# EAGLE board Shim_IWM (EAGLE 9.6.2)
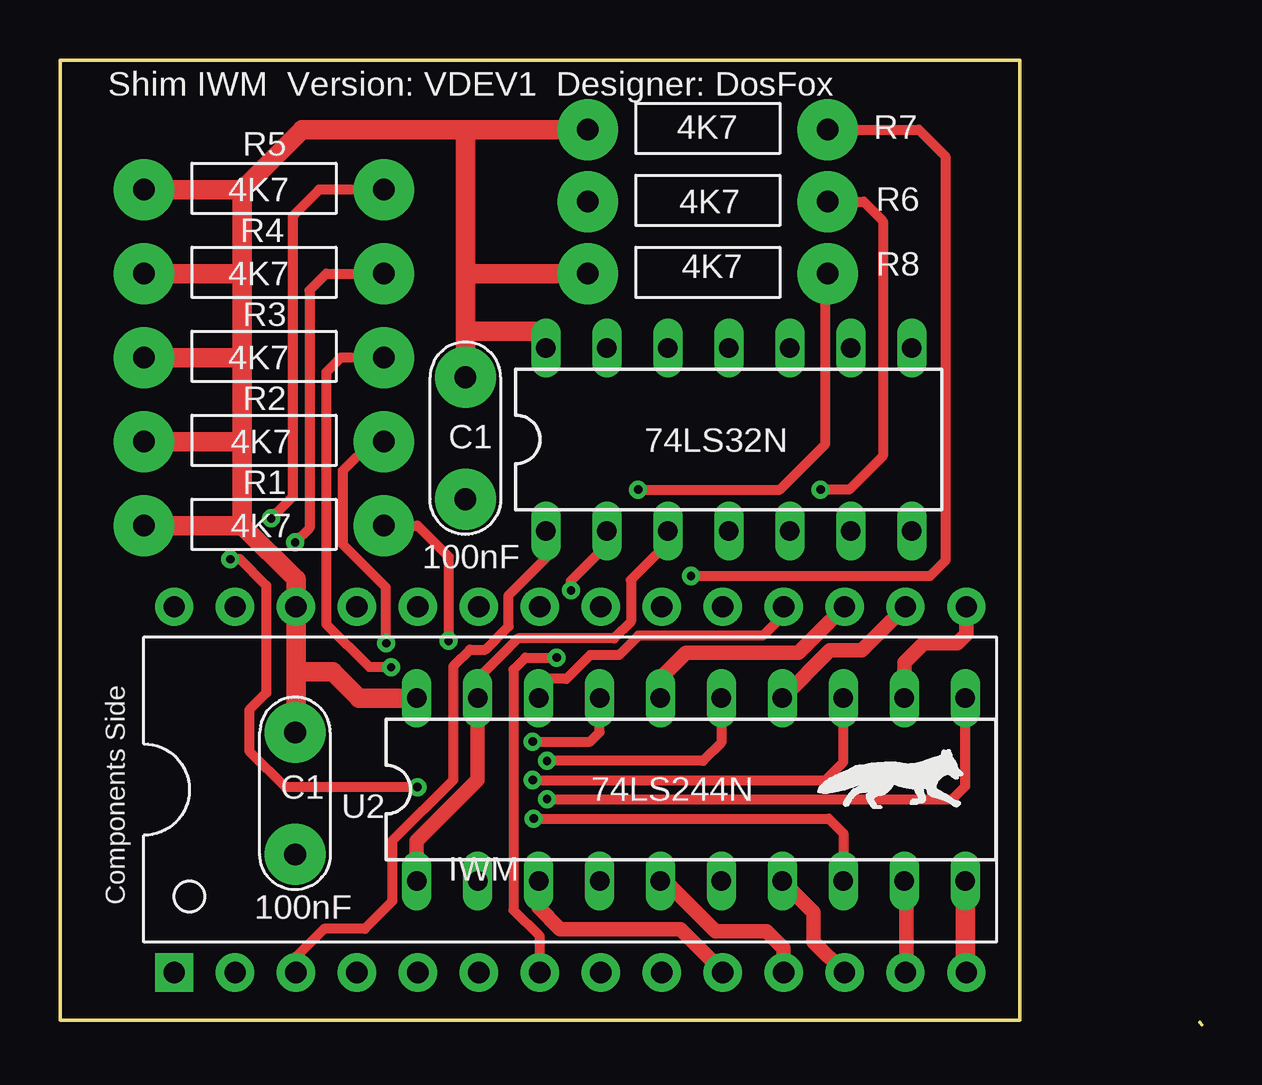
[diagram p0: board, top side]
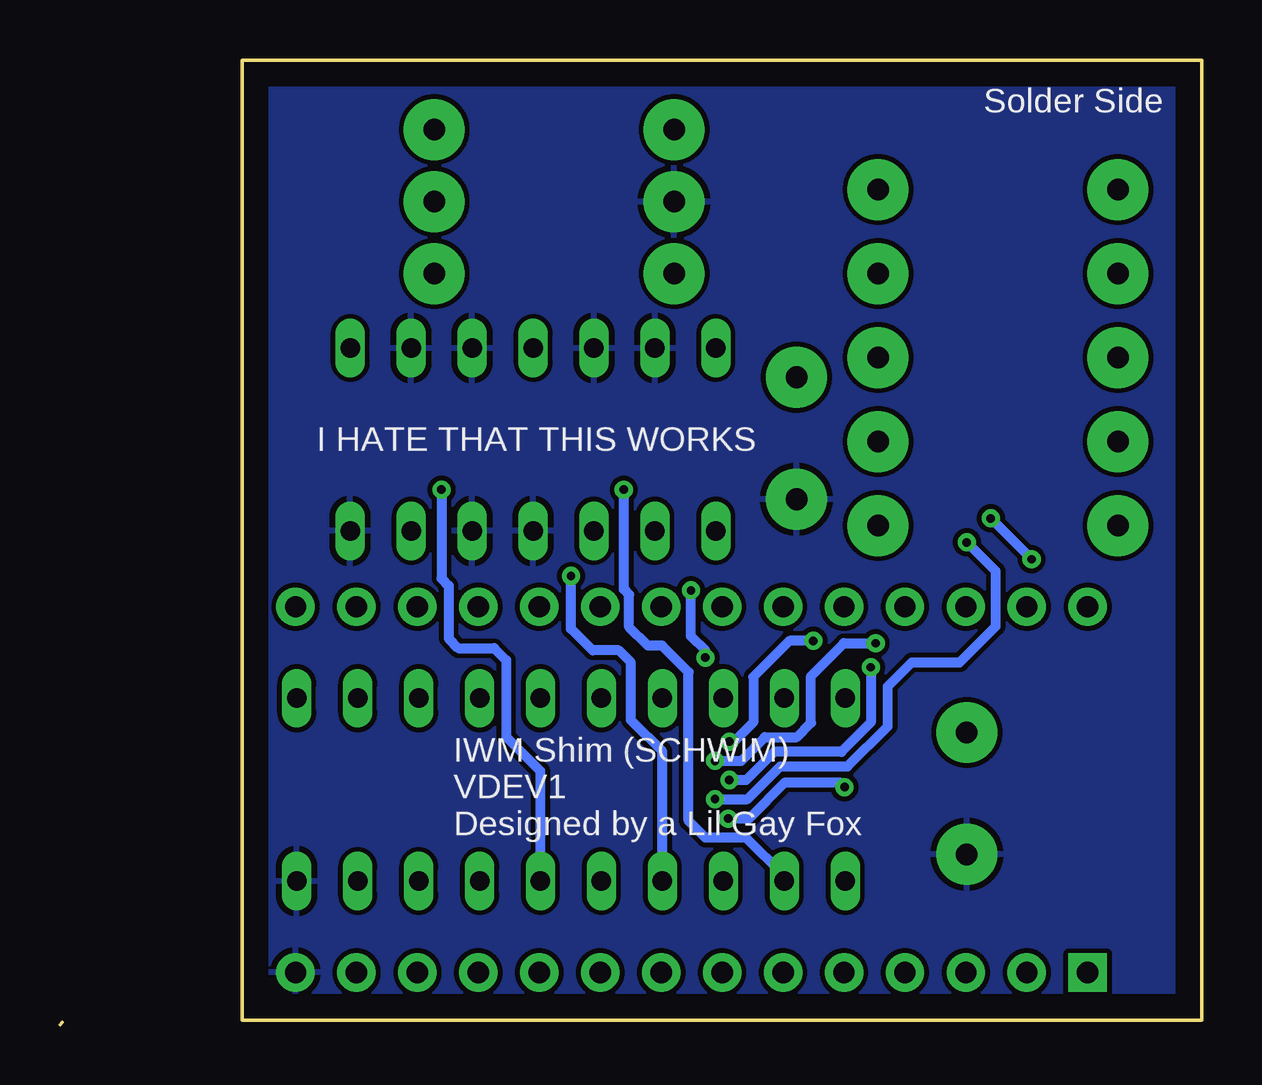
[diagram p1: board, bottom side, seen from below]

Size 47.6 x 40.2 mm. Coordinates in mm from the lower left corner, seen from the top.
Outline: 47.5,0.1 47.6,0
Outline: 0,0.2 40,0.2 40,40.2 0,40.2 0,0.2
Copper layers (1*16): Top 0.035mm / dielectric 1.5mm / Bottom 0.035mm
Design rules "default *": minimum track width 0.2mm, minimum drill 0.25mm, track to track 8mil, track to pad 8mil, pad to pad 8mil, via to via 8mil, smd to smd 8mil, copper to edge 40mil, drill to drill 8mil, minimum pad ring 1mil, minimum via ring 8mil, stop-mask expansion 4mil, vias tented up to drill 1mm, thermal gap 10mil

## Footprints (pad centres in the part's own frame; a part is rotated, then mirrored left to right if it is on the bottom)
CAP_5.08MM_PITCH = drill 0.9 pad 2.54: P$1 0,0; P$2 0,-5.08
RESISTORTHRUHOLE = drill 0.9 pad 2.54: P$1 0,0; P$2 10,0
DIL14 = drill 0.813 long: 1 -7.62,-3.81; 2 -5.08,-3.81; 3 -2.54,-3.81; 4 0,-3.81; 5 2.54,-3.81; 6 5.08,-3.81; 7 7.62,-3.81; 8 7.62,3.81; 9 5.08,3.81; 10 2.54,3.81; 11 0,3.81; 12 -2.54,3.81; 13 -5.08,3.81; 14 -7.62,3.81
DIL20 = drill 0.813 long: 1 -11.43,-3.81; 2 -8.89,-3.81; 3 -6.35,-3.81; 4 -3.81,-3.81; 5 -1.27,-3.81; 6 1.27,-3.81; 7 3.81,-3.81; 8 6.35,-3.81; 9 8.89,-3.81; 10 11.43,-3.81; 11 11.43,3.81; 12 8.89,3.81; 13 6.35,3.81; 14 3.81,3.81; 15 1.27,3.81; 16 -1.27,3.81; 17 -3.81,3.81; 18 -6.35,3.81; 19 -8.89,3.81; 20 -11.43,3.81
DIP28 = drill 0.889 pad 1.6 square: 1 -15.24,-7.62 | drill 0.889 pad 1.6: 2 -12.7,-7.62; 3 -10.16,-7.62; 4 -7.62,-7.62; 5 -5.08,-7.62; 6 -2.54,-7.62; 7 0,-7.62; 8 2.54,-7.62; 9 5.08,-7.62; 10 7.62,-7.62; 11 10.16,-7.62; 12 12.7,-7.62; 13 15.24,-7.62; 14 17.78,-7.62; 15 17.78,7.62; 16 15.24,7.62; 17 12.7,7.62; 18 10.16,7.62; 19 7.62,7.62; 20 5.08,7.62; 21 2.54,7.62; 22 0,7.62; 23 -2.54,7.62; 24 -5.08,7.62; 25 -7.62,7.62; 26 -10.16,7.62; 27 -12.7,7.62; 28 -15.24,7.62

## Placement (x,y rotation side)
A1  VDEV1  [PCB_CUSTOM_DETAILS]  -120.95,2.07 0 top  (outside the outline)
C1  100n 50V  [CAP_5.08MM_PITCH]  9.8,7.1 180 top
C2  100n 50V  [CAP_5.08MM_PITCH]  16.9,21.9 180 top
R1  4k7  [RESISTORTHRUHOLE]  13.5,20.8 180 top
R2  4k7  [RESISTORTHRUHOLE]  13.5,24.3 180 top
R3  4k7  [RESISTORTHRUHOLE]  13.5,27.8 180 top
R4  4k7  [RESISTORTHRUHOLE]  13.5,31.3 180 top
R5  4k7  [RESISTORTHRUHOLE]  13.5,34.8 180 top
R6  4k7  [RESISTORTHRUHOLE]  32,34.3 180 top
R7  4k7  [RESISTORTHRUHOLE]  32,37.3 180 top
R8  4k7  [RESISTORTHRUHOLE]  32,31.3 180 top
U1  74LS32N  [DIL14]  27.88,24.39 0 top
U2  74LS244N  [DIL20]  26.3,9.8 0 top
U$1  IWM  [DIP28]  20,9.8 0 top

## Library data of the parts
A1 = Schematic Symbols
C1 C2 = Capacitors TH; COMPONENT: Capacitor; COST: =(INDIRECT(ADDRESS(ROW(),1)))*(INDIRECT(ADDRESS(ROW(),13))); EA: =VLOOKUP(INDIRECT(ADDRESS(ROW(),7)),[ProductCosts.xlsx]StockCosts!$A:$B,2,FALSE); KPN: 3101-100N; PACKAGE: 5.08mm PITCH; PROCESS: TH
R1-R8 = Resistors TH; COMPONENT: Resistor; COST: =(INDIRECT(ADDRESS(ROW(),1)))*(INDIRECT(ADDRESS(ROW(),13))); EA: =(VLOOKUP(INDIRECT(ADDRESS(ROW(),6)),[ProductCosts.xlsx]StockCosts!$A:$B,2,FALSE))/1000; KPN: 3004-4k7; PACKAGE: Axial Leaded; PROCESS: TH
U1 = 74xx-us
U2 = 74xx-eu
U$1 = ICs

## Nets
!DEV: U1.2 U$1.7
+5V: C1.P$2 C2.P$2 R1.P$2 R2.P$2 R3.P$2 R4.P$2 R5.P$2 R7.P$2 R8.P$2 U1.14 U2.20 U$1.26
A0: U1.1 U$1.3
CONTROL: U1.3 U2.1 U2.19
D0: U2.3 U$1.10
D1: U2.5 U$1.11
D2: U2.7 U$1.12
D3: U2.9 U$1.13
D4: U2.12 U$1.15
D5: U2.14 U$1.16
D6: U2.16 U$1.17
D7: U2.18 U$1.18
GND: C1.P$1 C2.P$1 R6.P$2 U1.4 U1.5 U1.7 U1.9 U1.10 U1.12 U1.13 U2.10 U$1.14
RD0: R1.P$1 U2.17
RD1: R2.P$1 U2.15
RD2: R3.P$1 U2.13
RD3: R4.P$1 U2.11
RD4: R5.P$1 U2.8
RD5: R6.P$1 U2.6
RD6: R7.P$1 U2.4
RD7: R8.P$1 U2.2

## Tracks (layer width: path | path; a pad name or v marks a point on that pad's centre or on a via)
!DEV  (via drill 0.35)
  Top 0.406: U$1.7 20,3.68 18.9,4.78 18.9,14.8 19.4,15.3 v20.7,15.3 | v21.3,18.1 21.3,18.5 22.8,20 U1.2
  Bottom 0.406: v20.7,15.3 20.7,15.6 21.3,16.2 v21.3,18.1
+5V
  Top 0.813: 7.6,20.8 R1.P$2 | 7.6,20.8 9.84,18.56 U$1.26 9.84,14.7 | 7.6,20.8 7.6,24.3 | 7.6,24.3 7.6,27.7 | 7.6,27.7 7.6,31.3 | 7.6,31.3 7.6,34.8 | R5.P$2 7.6,34.8 | R4.P$2 7.6,31.3 | R3.P$2 7.5,27.8 7.6,27.7 | R2.P$2 7.6,24.3 | 16.9,37.3 10.1,37.3 7.6,34.8 | C2.P$2 16.9,28.9 | 16.9,28.9 16.9,31.5 | 16.9,31.5 16.9,37.3 | 16.9,31.5 17.1,31.3 R8.P$2 | 16.9,28.9 20.1,28.9 20.16,28.84 20.16,28.3 U1.14 | 9.84,14.7 9.84,12.22 C1.P$2 | 9.84,14.7 9.85,14.71 11.37,14.71 12.47,13.61 U2.20 | R7.P$2 16.9,37.3
A0
  Top 0.406: U1.1 20.26,19.46 18.7,17.9 18.7,16.6 17.74,15.64 17.09,15.64 16.39,14.93 16.39,10.19 13.85,7.66 13.85,5.15 12.7,4 11,4 9.84,2.84 U$1.3
CONTROL
  Top 0.406: U1.3 25.34,20.08 23.8,18.54 23.8,16.8 23.1,16.1 19.1,16.1 17.41,14.41 U2.19
  Top 0.61: U2.19 17.41,10.21 15.35,8.15 15.07,7.87 14.87,7.67 U2.1
D0
  Top 0.61: U2.3 19.95,4.89 20.85,3.99 25.86,3.99 27.62,2.23 U$1.10
D1
  Top 0.61: U$1.11 30.16,3.18 29.44,3.9 27.32,3.9 25.23,5.99 U2.5
D2
  Top 0.61: U$1.12 31.41,3.47 31.41,4.69 U2.7
D3
  Top 0.61: U$1.13 35.29,2.23 35.29,5.89 U2.9
D4
  Top 0.61: U$1.15 37.78,16.28 37.4,15.9 36,15.9 35.19,15.09 U2.12
D5
  Top 0.61: U$1.16 33.42,15.6 32.1,15.6 U2.14
D6
  Top 0.61: U2.16 25.03,14.43 26.1,15.5 30.78,15.5 U$1.17
D7
  Top 0.406: U$1.18 30.16,17.07 29.3,16.21 24.11,16.21 23.3,15.4 22.1,15.4 21.11,14.41 20.25,14.41 19.95,14.11 U2.18
GND
  Top 0.813: U2.10 37.73,2.23 U$1.14
  pour Bottom: 0,40.2 0,0.2 40,0.2 40,40.2
RD0  (via drill 0.35)
  Top 0.406: R1.P$1 14.9,20.8 16.2,19.5 v16.2,16 | v19.7,11.8 22.1,11.8 22.49,12.19 U2.17
  Bottom 0.406: v16.2,16 17.2,16 18.7,14.5 18.7,12.6 19.5,11.8 v19.7,11.8
RD1  (via drill 0.35)
  Top 0.406: U2.15 27.57,11.76 26.81,11 v20.3,11 | v13.6,15.9 13.59,15.91 13.59,18.22 11.8,20.01 11.8,23.1 13,24.3 R2.P$1
  Bottom 0.406: v13.6,15.9 14.93,15.9 16.29,14.53 16.29,12.58 16.89,11.98 18.22,11.98 19.2,11 v20.3,11
RD2  (via drill 0.35)
  Top 0.406: R3.P$1 11.7,27.8 11.1,27.2 11.1,16.7 12.9,14.9 v13.8,14.9 | U2.13 32.65,10.94 31.91,10.2 v19.7,10.2
  Bottom 0.406: v13.8,14.9 13.8,12.6 15.03,11.38 17.82,11.38 19,10.2 v19.7,10.2
RD3  (via drill 0.35)
  Top 0.406: U2.11 37.73,9.94 37.19,9.4 v20.3,9.4 | v9.8,20.1 10.4,20.7 10.4,30.6 11.1,31.3 R4.P$1
  Bottom 0.406: v9.8,20.1 8.6,18.9 8.6,16.6 10.1,15.1 12.1,15.1 13.1,14.1 13.1,12.44 14.77,10.76 17.57,10.76 18.94,9.4 v20.3,9.4
RD4  (via drill 0.35)
  Top 0.406: R5.P$1 10.8,34.8 9.7,33.7 9.7,22 v8.8,21.1 | v7.1,19.4 7.5,19.4 8.6,18.3 8.6,13.83 7.89,13.12 7.89,11.41 9.4,9.9 v14.9,9.9 | v19.75,8.59 32.05,8.59 32.65,7.99 U2.8
  Bottom 0.406: v8.8,21.1 v7.1,19.4 | v14.9,9.9 15.1,10.1 17.38,10.1 18.86,8.61 19.82,8.61 19.79,8.59 v19.75,8.59
RD5  (via drill 0.35)
  Top 0.406: R6.P$1 33.5,34.3 34.3,33.5 34.3,23.7 32.9,22.3 v31.7,22.3
  Bottom 0.406: v31.7,22.3 31.7,18.6 31.4,18.3 31.4,16.1 31,15.7 29.5,15.7 29,15.2 29,12 27.57,10.57 U2.6
RD6  (via drill 0.35)
  Top 0.406: R7.P$1 35.8,37.3 36.9,36.2 36.9,19.33 36.27,18.7 v26.3,18.7
  Bottom 0.406: U2.4 22.49,11.39 23.8,12.7 23.8,15.1 24.3,15.6 25.4,15.6 26.3,16.5 v26.3,18.7
RD7  (via drill 0.35)
  Top 0.406: v24.1,22.3 30,22.3 31.9,24.2 31.9,31.3 R8.P$1
  Bottom 0.406: U2.2 17.41,6.21 19,7.8 20.7,7.8 21.4,8.5 21.4,14.7 22.5,15.8 23.1,15.8 23.87,16.57 23.87,17.92 24.1,18.15 v24.1,22.3

## Text on the board
tNames: Shim IWM Version: VDEV1 Designer: DosFox | 4K7 | R7 | R5 | 4K7 | 4K7 | R6 | R4 | 4K7 | 4K7 | R8 | R3 | 4K7 | R2 | 4K7 | C1 | R1 | 4K7 | 100nF | C1 | Components Side | 100nF
bNames: Solder Side | I HATE THAT THIS WORKS | IWM Shim (SCHWIM) / VDEV1 / Designed by a Lil Gay Fox
tDocu: Yes | RP2040 Development Board | Yes | 40mm x 54.5mm | Yes | 2 | Yes | Yes | Yes | No | HASL (Lead Free) | Yes | Green (Both Sides) | Yes | White (Both Sides) | Yes | Yes | Yes | No | No | No